# EAGLE board pcb (EAGLE 9.6.2)
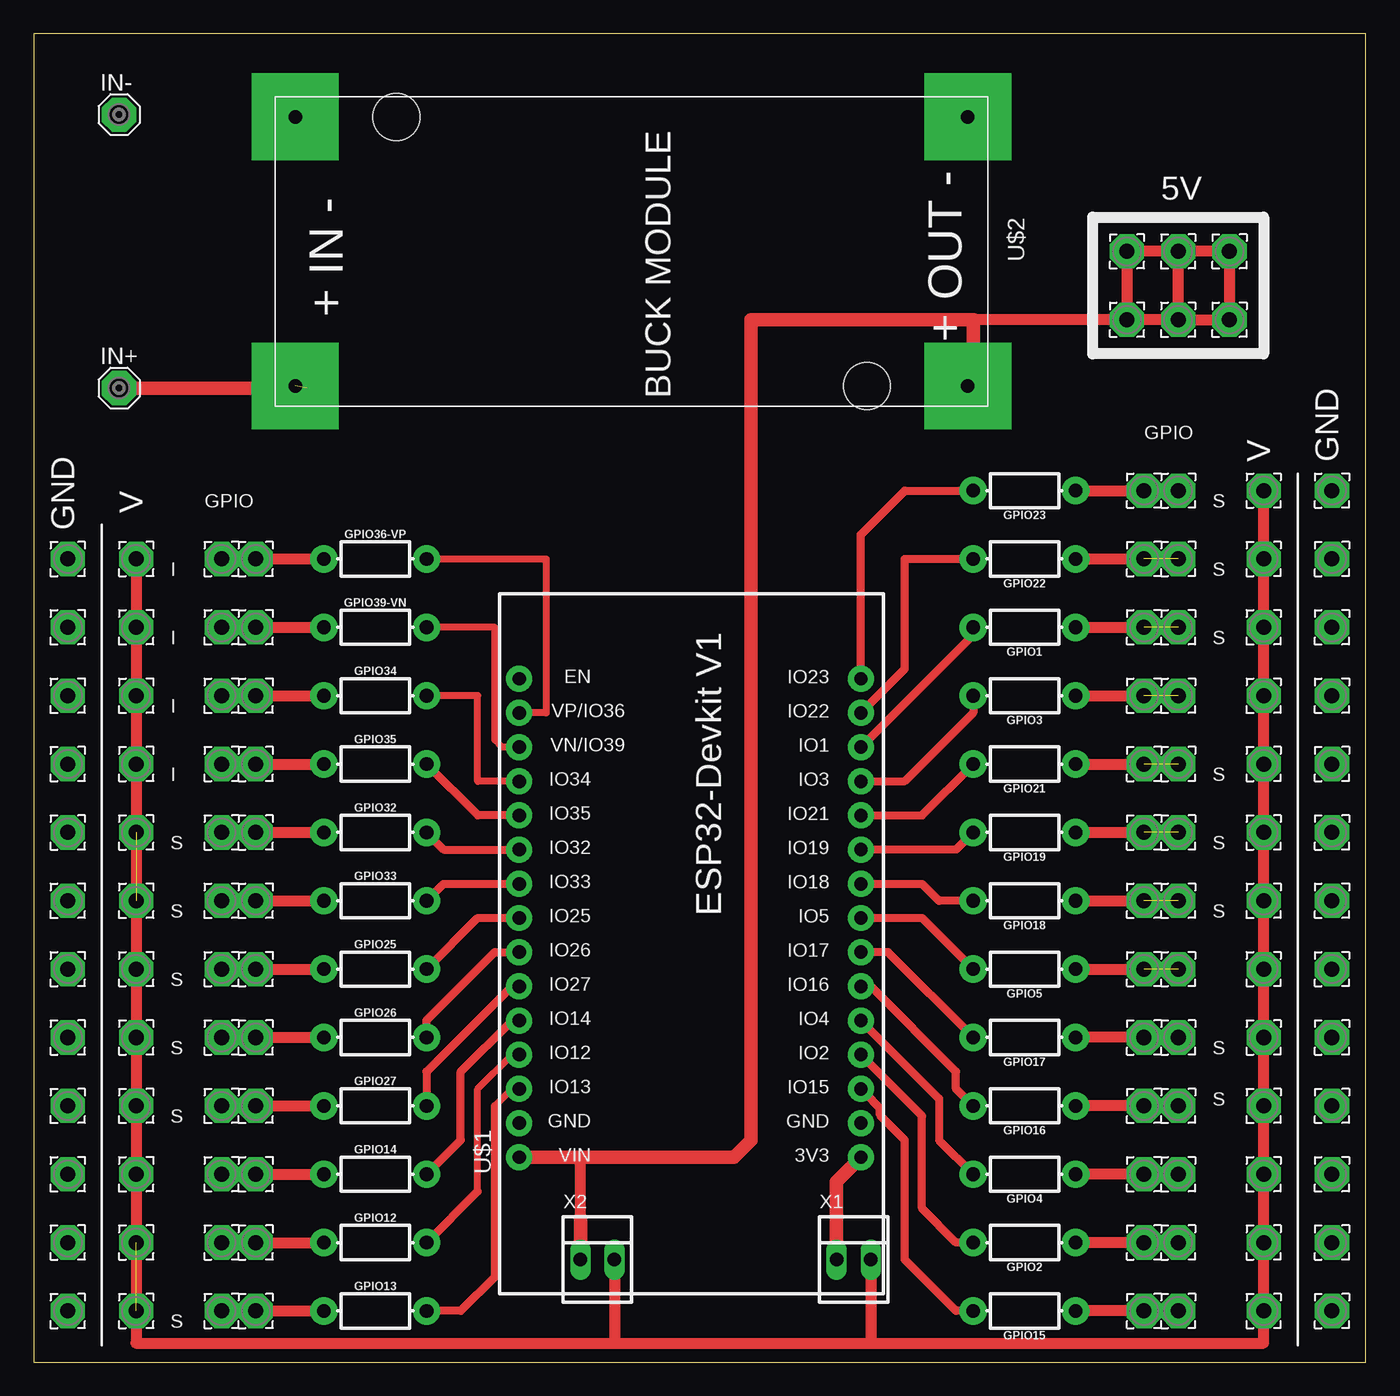
[diagram p0: board, top side]
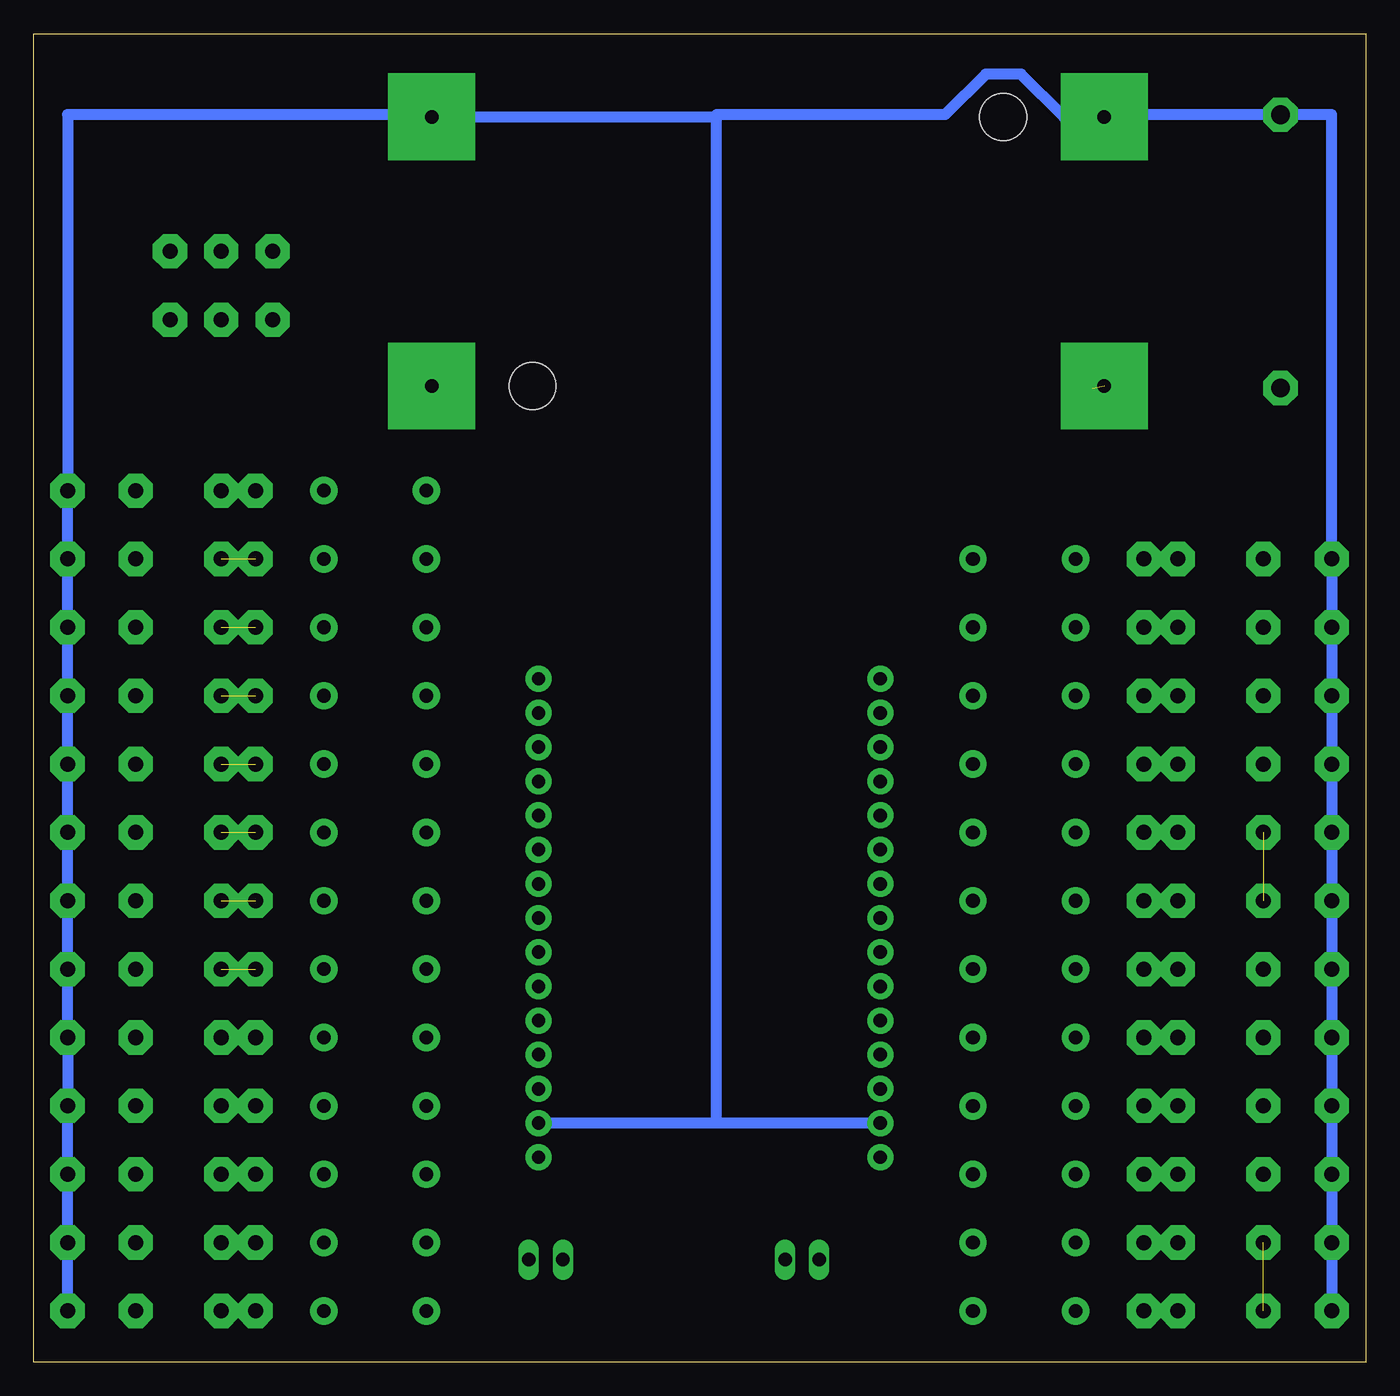
[diagram p1: board, bottom side, seen from below]

Size 99.04 x 98.73 mm. Coordinates in mm from the lower left corner, seen from the top.
Outline: 0,0 99.04,0 99.04,98.73 0,98.73 0,0
Copper layers (1*16): Top 0.035mm / dielectric 1.5mm / Bottom 0.035mm
Design rules "default": minimum track width 6mil, minimum drill 0.35mm, track to track 6mil, track to pad 6mil, pad to pad 6mil, via to via 6mil, smd to smd 6mil, copper to edge 40mil, drill to drill 6mil, minimum pad ring 10mil, minimum via ring 8mil, stop-mask expansion 4mil, vias tented up to drill 0mil, thermal gap 10mil

## Footprints (pad centres in the part's own frame; a part is rotated, then mirrored left to right if it is on the bottom)
AXIAL-0.3-KIT = drill 1.016 pad 2.032: P$1 -3.81,0; P$2 3.81,0
SE14 = drill 1.397 pad 2.54 octagon: MP 0,0
2,54/1,1 = drill 1.118 pad 2.54 octagon: 1 0,0
ESP32-DEVKITV1 = drill 1 pad 1.93: 3V3 -16.52,-12.27; D1 13.96,-12.27; D2 -8.9,-12.27; D3 11.42,-12.27; D4 -6.36,-12.27; D5 1.26,-12.27; D12 -8.9,13.135; D13 -11.44,13.135; D14 -6.36,13.135; D15 -11.44,-12.27; D16 -3.82,-12.27; D17 -1.28,-12.27; D18 3.8,-12.27; D19 6.34,-12.27; D21 8.88,-12.27; D22 16.5,-12.27; D23 19.04,-12.27; D25 1.26,13.135; D26 -1.28,13.135; D27 -3.82,13.135; D32 6.34,13.135; D33 3.8,13.135; D34 11.42,13.135; D35 8.88,13.135; D36 16.5,13.135; D39 13.96,13.135; EN 19.04,13.135; GND@1 -13.98,13.135; GND@2 -13.98,-12.27; VIN -16.52,13.135
BUCK_MODULE = drill 1 pad 6.452 square: 1 -10,-25; 2 10,-25; 3 -10,25; 4 10,25 | hole 3.5: -10,-17.5; 10,17.5
22-23-2021 = drill 1 long: 1 -1.27,0; 2 1.27,0

## Placement (x,y rotation side)
GPIO1  [AXIAL-0.3-KIT]  73.66,54.61 180 top
GPIO2  [AXIAL-0.3-KIT]  73.66,8.89 180 top
GPIO3  [AXIAL-0.3-KIT]  73.66,49.53 180 top
GPIO4  [AXIAL-0.3-KIT]  73.66,13.97 180 top
GPIO5  [AXIAL-0.3-KIT]  73.66,29.21 180 top
GPIO12  [AXIAL-0.3-KIT]  25.4,8.89 0 top
GPIO13  [AXIAL-0.3-KIT]  25.4,3.81 0 top
GPIO14  [AXIAL-0.3-KIT]  25.4,13.97 0 top
GPIO15  [AXIAL-0.3-KIT]  73.66,3.81 180 top
GPIO16  [AXIAL-0.3-KIT]  73.66,19.05 180 top
GPIO17  [AXIAL-0.3-KIT]  73.66,24.13 180 top
GPIO18  [AXIAL-0.3-KIT]  73.66,34.29 180 top
GPIO19  [AXIAL-0.3-KIT]  73.66,39.37 180 top
GPIO21  [AXIAL-0.3-KIT]  73.66,44.45 180 top
GPIO22  [AXIAL-0.3-KIT]  73.66,59.69 180 top
GPIO23  [AXIAL-0.3-KIT]  73.66,64.77 180 top
GPIO25  [AXIAL-0.3-KIT]  25.4,29.21 0 top
GPIO26  [AXIAL-0.3-KIT]  25.4,24.13 0 top
GPIO27  [AXIAL-0.3-KIT]  25.4,19.05 0 top
GPIO32  [AXIAL-0.3-KIT]  25.4,39.37 0 top
GPIO33  [AXIAL-0.3-KIT]  25.4,34.29 0 top
GPIO34  [AXIAL-0.3-KIT]  25.4,49.53 0 top
GPIO35  [AXIAL-0.3-KIT]  25.4,44.45 0 top
GPIO36-VP  [AXIAL-0.3-KIT]  25.4,59.69 0 top
GPIO39-VN  [AXIAL-0.3-KIT]  25.4,54.61 0 top
IN+  SE14  [SE14]  6.35,72.39 0 top
IN-  SE14  [SE14]  6.35,92.71 0 top
PAD1  [2,54/1,1]  13.97,44.45 0 top
PAD2  [2,54/1,1]  16.51,44.45 0 top
PAD3  [2,54/1,1]  16.51,49.53 0 top
PAD4  [2,54/1,1]  13.97,49.53 0 top
PAD5  [2,54/1,1]  16.51,34.29 0 top
PAD6  [2,54/1,1]  13.97,34.29 0 top
PAD7  [2,54/1,1]  13.97,39.37 0 top
PAD8  [2,54/1,1]  16.51,39.37 0 top
PAD9  [2,54/1,1]  13.97,19.05 0 top
PAD10  [2,54/1,1]  16.51,19.05 0 top
PAD11  [2,54/1,1]  13.97,24.13 0 top
PAD12  [2,54/1,1]  16.51,24.13 0 top
PAD13  [2,54/1,1]  13.97,29.21 0 top
PAD14  [2,54/1,1]  16.51,29.21 0 top
PAD15  [2,54/1,1]  13.97,13.97 0 top
PAD16  [2,54/1,1]  16.51,13.97 0 top
PAD17  [2,54/1,1]  13.97,3.81 0 top
PAD18  [2,54/1,1]  16.51,3.81 0 top
PAD19  [2,54/1,1]  16.51,8.89 0 top
PAD20  [2,54/1,1]  13.97,8.89 0 top
PAD21  [2,54/1,1]  82.55,54.61 0 top
PAD22  [2,54/1,1]  85.09,54.61 0 top
PAD23  [2,54/1,1]  85.09,8.89 0 top
PAD24  [2,54/1,1]  82.55,8.89 0 top
PAD25  [2,54/1,1]  85.09,49.53 0 top
PAD26  [2,54/1,1]  82.55,49.53 0 top
PAD27  [2,54/1,1]  85.09,13.97 0 top
PAD28  [2,54/1,1]  82.55,13.97 0 top
PAD29  [2,54/1,1]  82.55,29.21 0 top
PAD30  [2,54/1,1]  85.09,29.21 0 top
PAD31  [2,54/1,1]  2.54,19.05 0 top
PAD32  [2,54/1,1]  2.54,13.97 0 top
PAD33  [2,54/1,1]  2.54,8.89 0 top
PAD34  [2,54/1,1]  2.54,3.81 0 top
PAD35  [2,54/1,1]  96.52,29.21 0 top
PAD36  [2,54/1,1]  96.52,34.29 0 top
PAD37  [2,54/1,1]  96.52,24.13 0 top
PAD38  [2,54/1,1]  96.52,19.05 0 top
PAD39  [2,54/1,1]  96.52,3.81 0 top
PAD40  [2,54/1,1]  2.54,39.37 0 top
PAD41  [2,54/1,1]  2.54,34.29 0 top
PAD42  [2,54/1,1]  2.54,24.13 0 top
PAD43  [2,54/1,1]  82.55,3.81 0 top
PAD44  [2,54/1,1]  85.09,3.81 0 top
PAD45  [2,54/1,1]  82.55,19.05 0 top
PAD46  [2,54/1,1]  85.09,19.05 0 top
PAD47  [2,54/1,1]  82.55,24.13 0 top
PAD48  [2,54/1,1]  85.09,24.13 0 top
PAD49  [2,54/1,1]  82.55,34.29 0 top
PAD50  [2,54/1,1]  85.09,34.29 0 top
PAD51  [2,54/1,1]  82.55,39.37 0 top
PAD52  [2,54/1,1]  85.09,39.37 0 top
PAD53  [2,54/1,1]  2.54,44.45 0 top
PAD54  [2,54/1,1]  2.54,29.21 0 top
PAD55  [2,54/1,1]  82.55,44.45 0 top
PAD56  [2,54/1,1]  85.09,44.45 0 top
PAD57  [2,54/1,1]  82.55,59.69 0 top
PAD58  [2,54/1,1]  85.09,59.69 0 top
PAD59  [2,54/1,1]  82.55,64.77 0 top
PAD60  [2,54/1,1]  85.09,64.77 0 top
PAD61  [2,54/1,1]  96.52,54.61 0 top
PAD62  [2,54/1,1]  96.52,49.53 0 top
PAD63  [2,54/1,1]  96.52,44.45 0 top
PAD64  [2,54/1,1]  96.52,39.37 0 top
PAD65  [2,54/1,1]  2.54,49.53 0 top
PAD66  [2,54/1,1]  2.54,59.69 0 top
PAD67  [2,54/1,1]  96.52,8.89 0 top
PAD68  [2,54/1,1]  96.52,13.97 0 top
PAD69  [2,54/1,1]  16.51,59.69 0 top
PAD70  [2,54/1,1]  91.44,59.69 0 top
PAD71  [2,54/1,1]  13.97,59.69 0 top
PAD72  [2,54/1,1]  7.62,49.53 0 top
PAD73  [2,54/1,1]  7.62,29.21 0 top
PAD74  [2,54/1,1]  7.62,34.29 0 top
PAD75  [2,54/1,1]  7.62,24.13 0 top
PAD76  [2,54/1,1]  7.62,3.81 0 top
PAD77  [2,54/1,1]  2.54,54.61 0 top
PAD78  [2,54/1,1]  91.44,24.13 0 top
PAD79  [2,54/1,1]  91.44,29.21 0 top
PAD80  [2,54/1,1]  91.44,34.29 0 top
PAD81  [2,54/1,1]  91.44,49.53 0 top
PAD82  [2,54/1,1]  91.44,64.77 0 top
PAD83  [2,54/1,1]  7.62,59.69 0 top
PAD84  [2,54/1,1]  7.62,54.61 0 top
PAD85  [2,54/1,1]  7.62,44.45 0 top
PAD86  [2,54/1,1]  7.62,39.37 0 top
PAD87  [2,54/1,1]  7.62,13.97 0 top
PAD88  [2,54/1,1]  7.62,8.89 0 top
PAD89  [2,54/1,1]  91.44,13.97 0 top
PAD90  [2,54/1,1]  91.44,8.89 0 top
PAD91  [2,54/1,1]  91.44,19.05 0 top
PAD92  [2,54/1,1]  91.44,39.37 0 top
PAD93  [2,54/1,1]  91.44,44.45 0 top
PAD94  [2,54/1,1]  91.44,54.61 0 top
PAD95  [2,54/1,1]  13.97,54.61 0 top
PAD96  [2,54/1,1]  16.51,54.61 0 top
PAD97  [2,54/1,1]  96.52,59.69 0 top
PAD98  [2,54/1,1]  96.52,64.77 0 top
PAD99  [2,54/1,1]  7.62,19.05 0 top
PAD100  [2,54/1,1]  91.44,3.81 0 top
PAD101  [2,54/1,1]  81.28,82.55 0 top
PAD102  [2,54/1,1]  81.28,77.47 0 top
PAD103  [2,54/1,1]  85.09,82.55 0 top
PAD104  [2,54/1,1]  85.09,77.47 0 top
PAD105  [2,54/1,1]  88.9,82.55 0 top
PAD106  [2,54/1,1]  88.9,77.47 0 top
U$1  ESP32DEVKITV1  [ESP32-DEVKITV1]  49.23,31.75 90 top
U$2  BUCK_MODULEWITH_SMDPADS&THROUGHHOLES  [BUCK_MODULE]  44.45,82.55 270 top
X1  3.3V  [22-23-2021]  60.96,7.62 0 top
X2  5V  [22-23-2021]  41.91,7.62 0 top

## Library data of the parts
GPIO1-GPIO5 GPIO13-GPIO19 GPIO21-GPIO23 GPIO25-GPIO27 GPIO32-GPIO35 GPIO36-VP GPIO39-VN = SparkFun-Resistors
GPIO12 = SparkFun-Resistors; SPICEPREFIX: B
IN+ IN- = solpad
PAD1-PAD18 PAD21-PAD106 = wirepad
PAD19 PAD20 = wirepad; SPICEPREFIX: X
U$1 = ESP32-DEVKITV1
U$2 = BUCK_MODULE
X1 X2 = con-molex; MF: MOLEX; MPN: 22-23-2021; OC_FARNELL: 1462926; OC_NEWARK: 25C3832

## Nets
GPIO1: GPIO1.P$2 U$1.D1
GPIO2: GPIO2.P$2 U$1.D2
GPIO3: GPIO3.P$2 U$1.D3
GPIO4: GPIO4.P$2 U$1.D4
GPIO5: GPIO5.P$2 U$1.D5
GPIO12: GPIO12.P$2 U$1.D12
GPIO13: GPIO13.P$2 U$1.D13
GPIO14: GPIO14.P$2 U$1.D14
GPIO15: GPIO15.P$2 U$1.D15
GPIO16: GPIO16.P$2 U$1.D16
GPIO17: GPIO17.P$2 U$1.D17
GPIO18: GPIO18.P$2 U$1.D18
GPIO19: GPIO19.P$2 U$1.D19
GPIO21: GPIO21.P$2 U$1.D21
GPIO22: GPIO22.P$2 U$1.D22
GPIO23: GPIO23.P$2 U$1.D23
GPIO25: GPIO25.P$2 U$1.D25
GPIO26: GPIO26.P$2 U$1.D26
GPIO27: GPIO27.P$2 U$1.D27
GPIO32: GPIO32.P$2 U$1.D32
GPIO33: GPIO33.P$2 U$1.D33
GPIO34: GPIO34.P$2 U$1.D34
GPIO35: GPIO35.P$2 U$1.D35
N$1: GPIO35.P$1 PAD1.1 PAD2.1
N$2: GPIO34.P$1 PAD3.1 PAD4.1
N$3: GPIO33.P$1 PAD5.1 PAD6.1
N$4: GPIO32.P$1 PAD7.1 PAD8.1
N$5: GPIO27.P$1 PAD9.1 PAD10.1
N$6: GPIO26.P$1 PAD11.1 PAD12.1
N$7: GPIO25.P$1 PAD13.1 PAD14.1
N$8: GPIO14.P$1 PAD15.1 PAD16.1
N$9: GPIO13.P$1 PAD17.1 PAD18.1
N$10: GPIO12.P$1 PAD19.1 PAD20.1
N$11: GPIO1.P$1 PAD21.1 PAD22.1
N$12: GPIO2.P$1 PAD23.1 PAD24.1
N$13: GPIO3.P$1 PAD25.1 PAD26.1
N$14: GPIO4.P$1 PAD27.1 PAD28.1
N$15: GPIO5.P$1 PAD29.1 PAD30.1
N$16: PAD101.1 PAD102.1 PAD103.1 PAD104.1 PAD105.1 PAD106.1 U$1.VIN U$2.4 X2.1
N$17: IN-.MP PAD31.1 PAD32.1 PAD33.1 PAD34.1 PAD35.1 PAD36.1 PAD37.1 PAD38.1 PAD39.1 PAD40.1 PAD41.1 PAD42.1 PAD53.1 PAD54.1 PAD61.1 PAD62.1 PAD63.1 PAD64.1 PAD65.1 PAD66.1 PAD67.1 PAD68.1 PAD77.1 PAD97.1 PAD98.1 U$1.GND@1 U$1.GND@2 U$2.1 U$2.3
N$18: IN+.MP U$2.2
N$19: GPIO36-VP.P$1 PAD69.1 PAD71.1
N$20: PAD70.1 PAD72.1 PAD73.1 PAD74.1 PAD75.1 PAD76.1 PAD78.1 PAD79.1 PAD80.1 PAD81.1 PAD82.1 PAD83.1 PAD84.1 PAD85.1 PAD86.1 PAD87.1 PAD88.1 PAD89.1 PAD90.1 PAD91.1 PAD92.1 PAD93.1 PAD94.1 PAD99.1 PAD100.1 X1.2 X2.2
N$21: GPIO39-VN.P$1 PAD95.1 PAD96.1
N$22: GPIO15.P$1 PAD43.1 PAD44.1
N$23: GPIO16.P$1 PAD45.1 PAD46.1
N$24: GPIO17.P$1 PAD47.1 PAD48.1
N$25: GPIO18.P$1 PAD49.1 PAD50.1
N$26: GPIO19.P$1 PAD51.1 PAD52.1
N$27: U$1.3V3 X1.1
N$28: GPIO21.P$1 PAD55.1 PAD56.1
N$29: GPIO22.P$1 PAD57.1 PAD58.1
N$30: GPIO23.P$1 PAD59.1 PAD60.1
VN: GPIO39-VN.P$2 U$1.D39
VP: GPIO36-VP.P$2 U$1.D36

## Tracks (layer width: path | path; a pad name or v marks a point on that pad's centre or on a via)
GPIO1
  Top 0.61: U$1.D1 69.85,54.06 GPIO1.P$2
GPIO2
  Top 0.61: GPIO2.P$2 68.58,8.89 66.04,11.43 66.04,18.31 U$1.D2
GPIO3
  Top 0.152: U$1.D3 62.22,43.17
  Top 0.61: GPIO3.P$2 69.85,48.26 64.77,43.18 61.51,43.18 U$1.D3
GPIO4
  Top 0.61: GPIO4.P$2 67.31,16.51 67.31,19.58 U$1.D4
GPIO5
  Top 0.61: GPIO5.P$2 66.04,33.02 61.51,33.02 U$1.D5
GPIO12
  Top 0.508: 33.02,12.7 33.02,20.32 35.55,22.85 U$1.D12
  Top 0.61: GPIO12.P$2 33.02,12.7
GPIO13
  Top 0.508: 34.29,19.04 35.56,20.31 U$1.D13
  Top 0.61: 34.29,19.04 34.29,6.35 31.75,3.81 GPIO13.P$2
GPIO14
  Top 0.152: 35.56,25.39 U$1.D14
  Top 0.61: GPIO14.P$2 31.75,16.51 31.75,21.59 35.55,25.39 35.56,25.39
GPIO15
  Top 0.152: 61.86,19.95 U$1.D15
  Top 0.61: GPIO15.P$2 68.58,3.81 64.77,7.62 64.77,16.51 62.92,18.36 62.92,18.89 61.86,19.95
GPIO16
  Top 0.61: GPIO16.P$2 68.58,20.32 68.58,21.59 62.24,27.93 U$1.D16
GPIO17
  Top 0.61: GPIO17.P$2 63.51,30.47 U$1.D17
GPIO18
  Top 0.61: GPIO18.P$2 67.3,34.29 66.04,35.55 U$1.D18
GPIO19
  Top 0.61: GPIO19.P$2 68.57,38.09 U$1.D19
GPIO21
  Top 0.61: GPIO21.P$2 66.04,40.64 61.51,40.64 U$1.D21
GPIO22
  Top 0.152: 66.04,59.69 GPIO22.P$2
  Top 0.61: U$1.D22 64.77,51.52 64.77,58.42 64.77,59.69 GPIO22.P$2
GPIO23
  Top 0.61: U$1.D23 61.5,61.5 64.77,64.77 GPIO23.P$2
GPIO25
  Top 0.152: 36.09,33.02 U$1.D25
  Top 0.61: GPIO25.P$2 33.02,33.02 36.09,33.02
GPIO26
  Top 0.61: GPIO26.P$2 29.21,25.4 34.28,30.47 U$1.D26
GPIO27
  Top 0.61: U$1.D27 35.55,27.93 29.21,21.59 GPIO27.P$2
GPIO32
  Top 0.61: GPIO32.P$2 30.49,38.09 U$1.D32
GPIO33
  Top 0.61: GPIO33.P$2 30.47,35.55 U$1.D33
GPIO34
  Top 0.508: U$1.D34 33.03,43.17 33.02,43.18 33.02,49.53 GPIO34.P$2
GPIO35
  Top 0.61: U$1.D35 33.03,40.63 GPIO35.P$2
N$1
  Top 0.813: PAD1.1 PAD2.1 GPIO35.P$1
N$2
  Top 0.813: PAD4.1 PAD3.1 GPIO34.P$1
N$3
  Top 0.813: PAD6.1 PAD5.1 GPIO33.P$1
N$4
  Top 0.813: PAD7.1 PAD8.1 GPIO32.P$1
N$5
  Top 0.813: PAD9.1 PAD10.1 GPIO27.P$1
N$6
  Top 0.813: PAD11.1 PAD12.1 GPIO26.P$1
N$7
  Top 0.813: PAD13.1 PAD14.1 GPIO25.P$1
N$8
  Top 0.813: PAD15.1 PAD16.1 GPIO14.P$1
N$9
  Top 0.813: PAD17.1 PAD18.1 GPIO13.P$1
N$10
  Top 0.813: PAD20.1 PAD19.1 GPIO12.P$1
N$11  (1 unrouted)
  Top 0.813: GPIO1.P$1 PAD22.1
N$12
  Top 0.813: PAD23.1 PAD24.1 GPIO2.P$1
N$13  (1 unrouted)
  Top 0.813: GPIO3.P$1 PAD25.1
N$14
  Top 0.813: PAD27.1 PAD28.1 GPIO4.P$1
N$15  (1 unrouted)
  Top 0.813: GPIO5.P$1 PAD30.1
N$16
  Top 0.813: 40.64,10.16 40.64,15.23 | PAD104.1 PAD106.1 PAD105.1 PAD103.1 | PAD103.1 PAD101.1 PAD102.1 | PAD104.1 PAD102.1 | PAD104.1 PAD103.1 | PAD102.1 69.85,77.47
  Top 1.016: U$1.VIN 40.64,15.23 52.06,15.23 53.34,16.51 53.34,77.47 69.85,77.47 69.85,72.95 U$2.4 | 40.64,10.69 40.64,10.16 X2.1
N$17
  Bottom 0.813: PAD34.1 PAD33.1 PAD32.1 PAD31.1 PAD42.1 PAD54.1 PAD41.1 PAD40.1 PAD53.1 PAD65.1 PAD77.1 PAD66.1 2.54,92.71 IN-.MP 20.16,92.71 20.32,92.55 | PAD39.1 PAD67.1 PAD68.1 PAD38.1 PAD37.1 PAD35.1 PAD36.1 PAD64.1 PAD63.1 PAD62.1 PAD61.1 PAD97.1 PAD98.1 96.52,92.71 69.61,92.71 U$2.3 48.42,92.55 48.26,92.71 | U$2.1 20.32,92.55 | 20.32,92.55 22.46,92.55 25.64,95.72 28.26,95.72 31.28,92.71 48.26,92.71 | U$1.GND@1 48.26,17.77 | 48.26,17.77 U$1.GND@2 | 48.26,17.77 48.26,92.71
N$18  (1 unrouted)
  Top 1.016: IN+.MP 20.32,72.39
N$19
  Top 0.813: PAD71.1 PAD69.1 GPIO36-VP.P$1
N$20  (2 unrouted)
  Top 0.813: PAD83.1 PAD84.1 PAD72.1 PAD85.1 PAD86.1 PAD73.1 PAD75.1 PAD99.1 PAD87.1 PAD88.1 7.62,1.42 43.18,1.42 | 43.18,1.42 62.23,1.42 | 62.23,1.42 91.44,1.42 PAD100.1 PAD90.1 PAD89.1 PAD91.1 PAD78.1 PAD79.1 PAD80.1 PAD92.1 PAD93.1 PAD81.1 PAD94.1 PAD70.1 PAD82.1 | X1.2 62.23,1.42 | X2.2 43.18,1.42
N$21
  Top 0.813: PAD95.1 PAD96.1 GPIO39-VN.P$1
N$22
  Top 0.813: PAD44.1 PAD43.1 GPIO15.P$1
N$23
  Top 0.813: PAD46.1 PAD45.1 GPIO16.P$1
N$24
  Top 0.813: PAD48.1 PAD47.1 GPIO17.P$1
N$25  (1 unrouted)
  Top 0.813: GPIO18.P$1 PAD50.1
N$26  (1 unrouted)
  Top 0.813: GPIO19.P$1 PAD52.1
N$27
  Top 1.016: X1.1 59.69,13.42 U$1.3V3
N$28  (1 unrouted)
  Top 0.813: GPIO21.P$1 PAD56.1
N$29  (1 unrouted)
  Top 0.813: GPIO22.P$1 PAD58.1
N$30
  Top 0.813: PAD60.1 PAD59.1 | 81.28,64.77 PAD59.1 | GPIO23.P$1 PAD59.1
VN
  Top 0.508: U$1.D39 34.83,45.71 34.29,46.25 34.29,54.61 GPIO39-VN.P$2
VP
  Top 0.508: GPIO36-VP.P$2 38.1,59.69 38.1,48.26 38.09,48.25 U$1.D36

## Text on the board
tNames: 5V | GND | GPIO | V | GND | V | GPIO | S | I | S | I | S | I | I | S | S | S | S | S | S | S | S | S | S | S